# Altium PCB brushless_nosensor - 副本 - 副本.PcbDoc
Units mil, origin at the board's own origin, x right, y up, seen from the top; angles counter-clockwise.
Board outline 1665 x 840 mil, 2 copper layers (Top Layer, Bottom Layer); 70 components, 60 nets, 255 pads, 93 vias.
Unrouted connection lines stored in the file: 1.
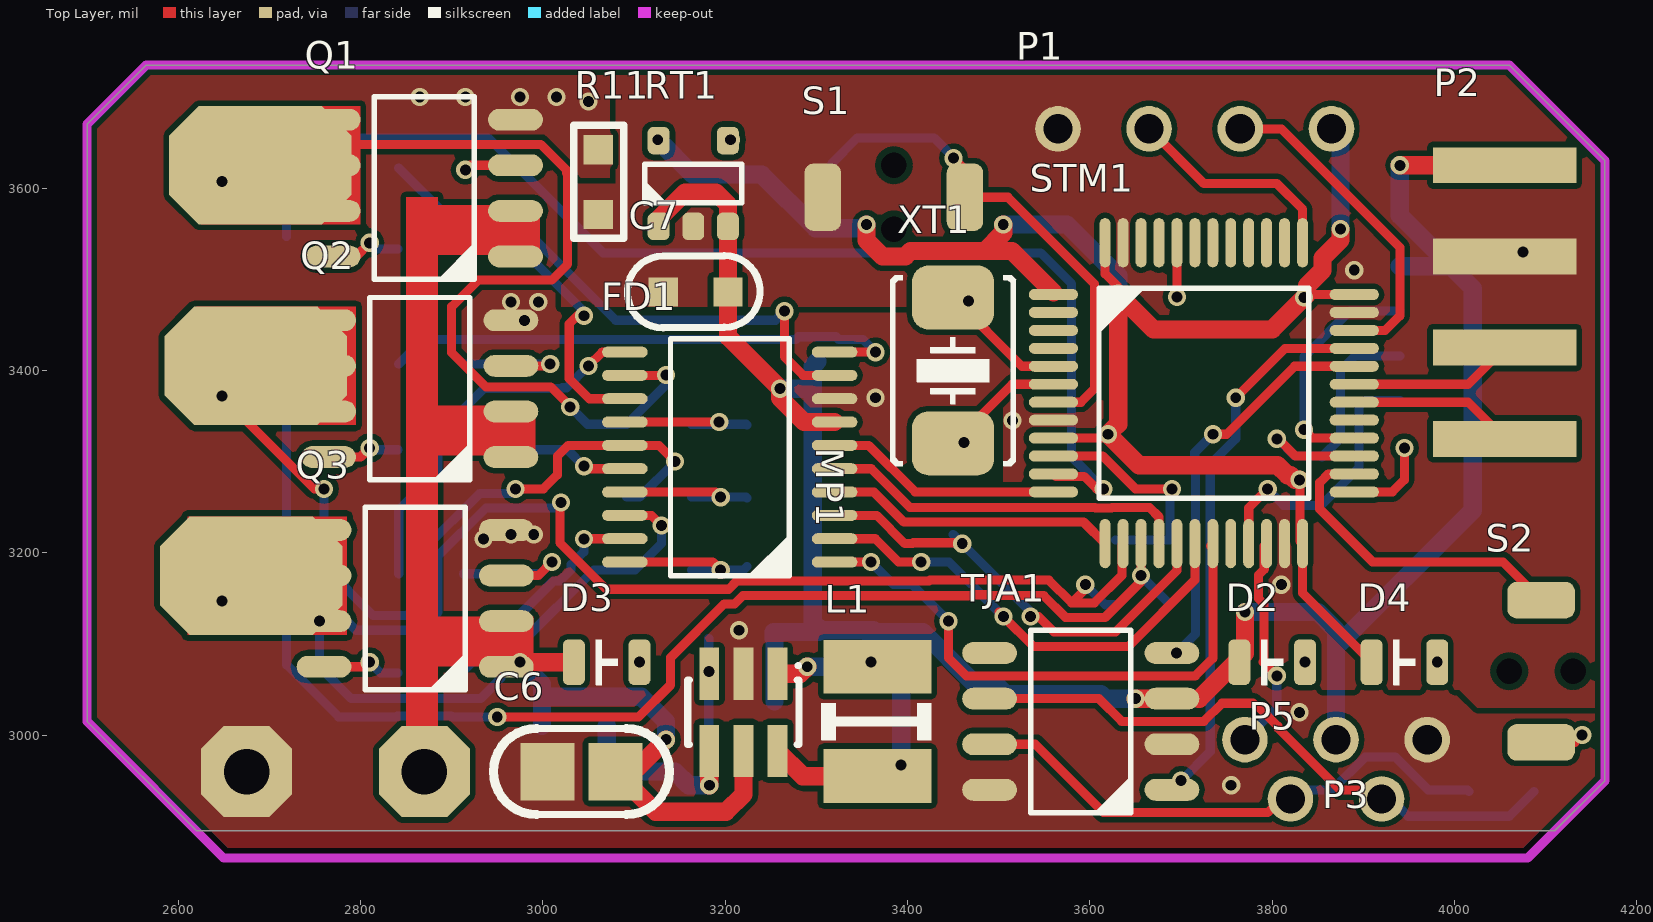
[diagram p0: Top Layer view]
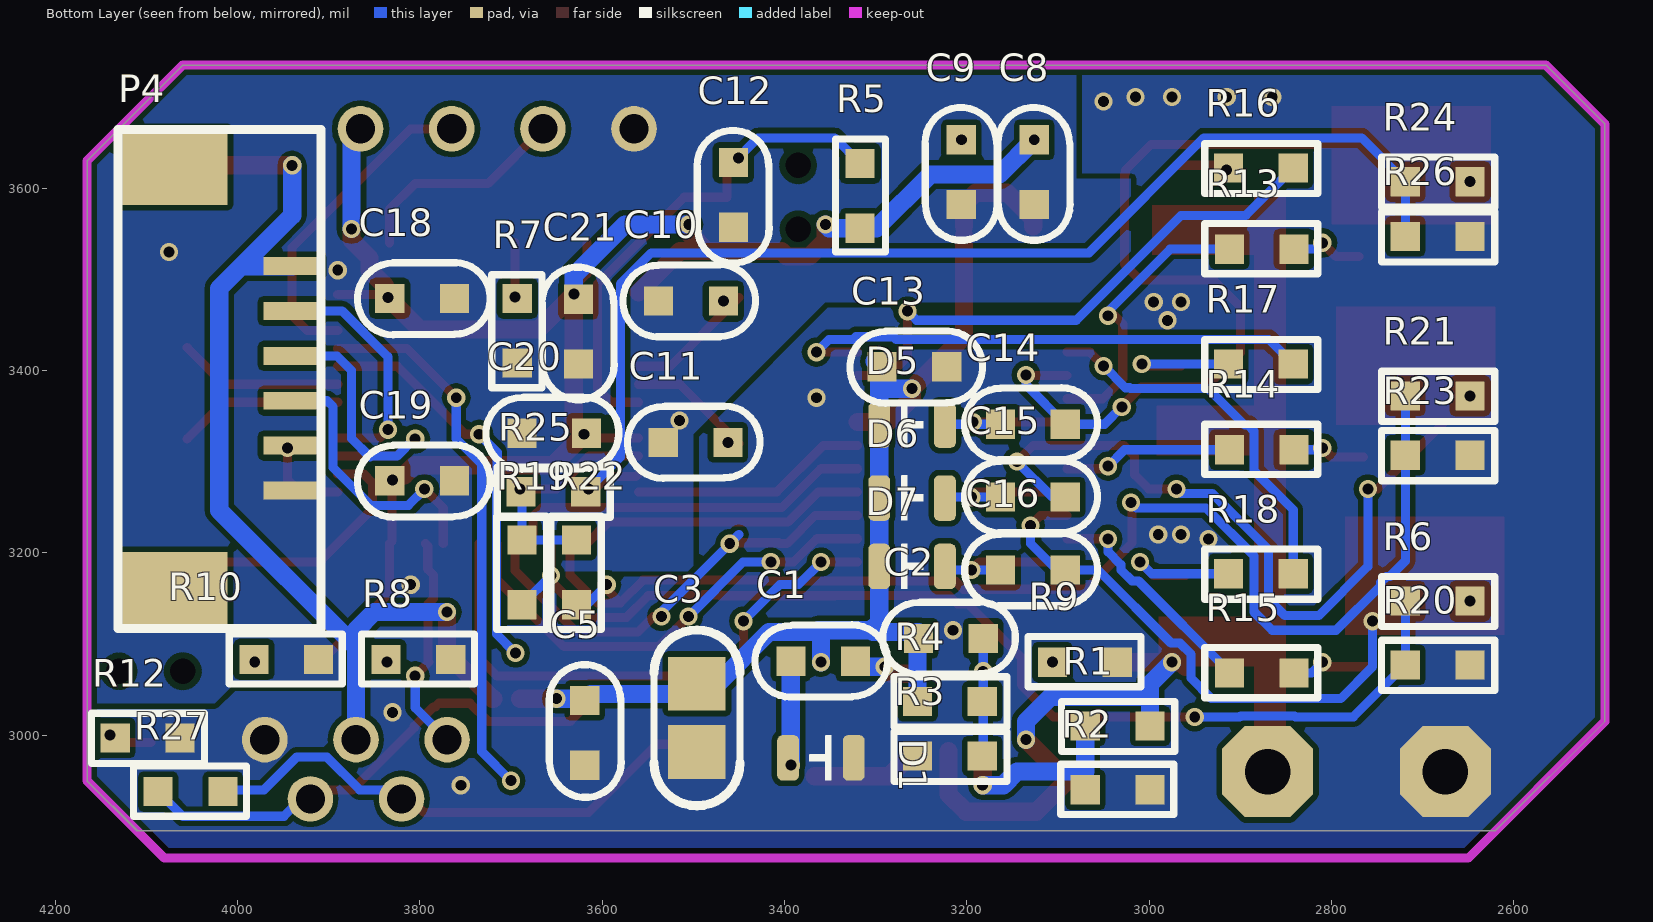
[diagram p1: Bottom Layer view, seen from below]
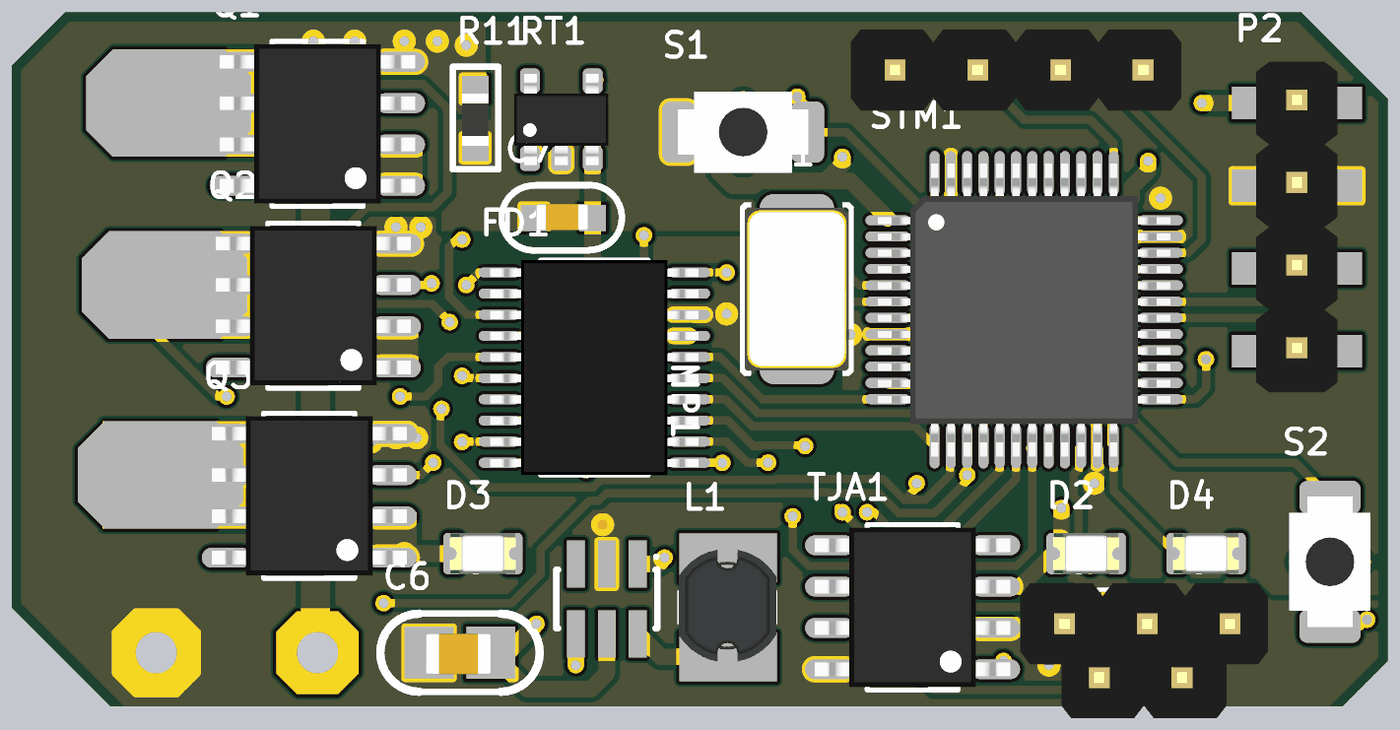
[diagram p2: 3D render of the assembled board from above, using the file's embedded part models]
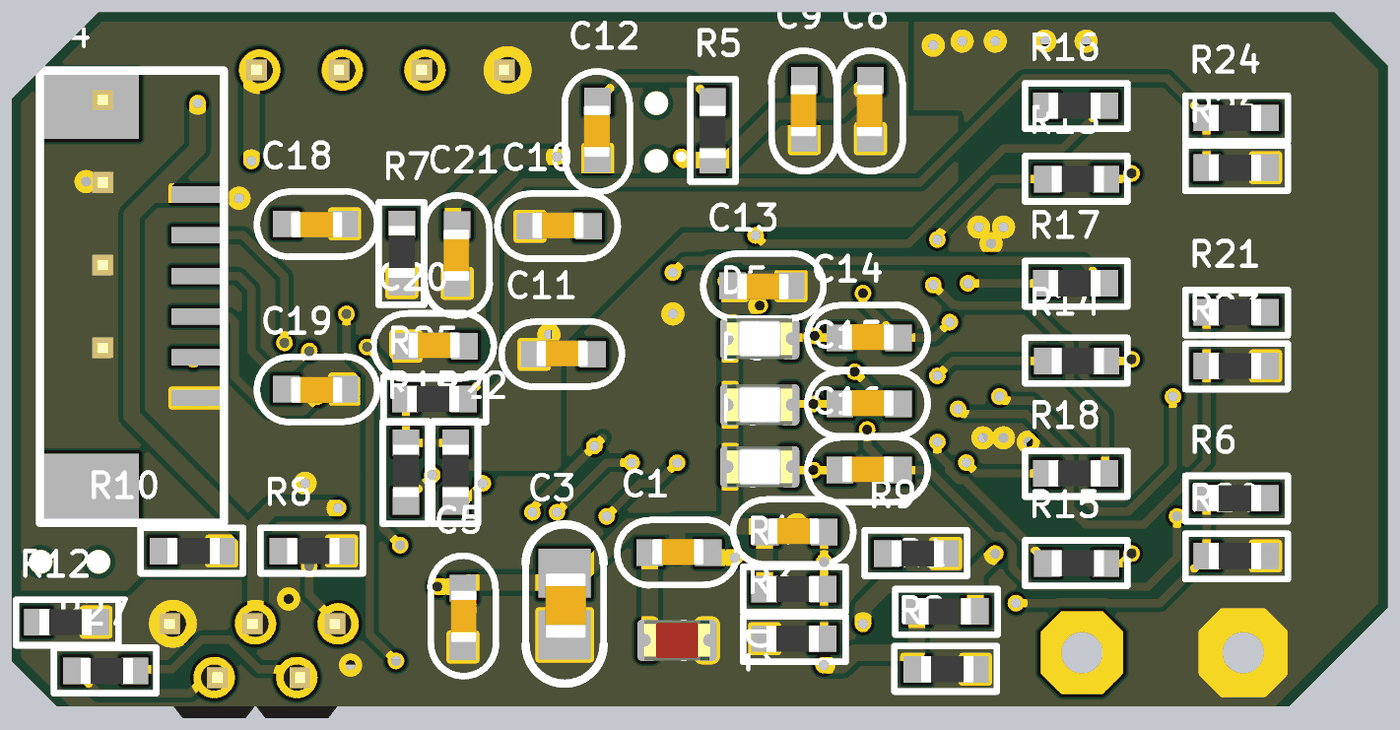
[diagram p3: 3D render of the assembled board from below, using the file's embedded part models]

## Layer stack, top to bottom
Top Solder: solder mask 0.4, Solder Resist, Dk 3.5
Top Layer: signal copper 1.4
Dielectric 1: dielectric 12.6, FR-4, Dk 4.8
Bottom Layer: signal copper 1.4
Bottom Solder: solder mask 0.4, Solder Resist, Dk 3.5

## Board outline
2620,2895 2500,3015 2500,3670 2565,3735 4060,3735 4165,3630 4165,2950 4110,2895

## Design rules (kind name [scope] priority, off if disabled: settings)
Clearance [All] p1: gap=6 ignorepadtopadclearanceinfootprint=FALSE
PlaneConnect [All] p1: planeconnectstyle=Direct reliefexpansion=20 reliefentries=4 reliefconductorwidth=10 reliefairgap=10
PolygonConnect [All] p1: connectstyle=Direct reliefconductorwidth=10 reliefentries=4 polygonreliefangle="90 Angle" airgapwidth=10
RoutingVias [All] p1: holewidth=28 width=50 viastyle="Through Hole" minholewidth=28 minwidth=50 maxholewidth=28 maxwidth=50
SolderMaskExpansion [All] p1: expansion=4
Width [All] p1: maxlimit=100 minlimit=10 preferedwidth=10 minimp=50.000000 maximp=50.000000 favimp=50.000000
29 further rules are at their usual default settings.

## Components (designator, comment, footprint, x,y, rotation, side; value= is the part's Value field where it differs from the comment)
C1 "Cap_0603" CAP_0603 3360,3080 r180 bottom value=0.1u
C2 "Cap_0603" CAP_0603 3220,3105 r180 bottom value=33pF
C3 "Cap_0805" CAP_0805 3495,3020 r90 bottom value=10u
C5 "Cap_0603" CAP_0603 3620,3005 r270 bottom value=0.1uF
C6 "Cap_0805" CAP_0805 3043.46,2959.01 r0 top value=10u
C7 "Cap_0603" CAP_0603 3165,3485 r0 top value=1u
C8 "Cap_0603" CAP_0603 3125,3615 r90 bottom value=0.1u
C9 "Cap_0603" CAP_0603 3205,3615 r90 bottom value=22n
C10 "Cap_0603" CAP_0603 3505,3475 r180 bottom value=20pf
C11 "Cap_0603" CAP_0603 3500,3320 r180 bottom value=20pf
C12 "Cap_0603" CAP_0603 3455,3590 r90 bottom value=0.1u
C13 "Cap_0603" CAP_0603 3255,3405 r0 bottom value=0.1u
C14 "Cap_0603" CAP_0603 3130,3340 r180 bottom value=0.1u
C15 "Cap_0603" CAP_0603 3130,3260 r180 bottom value=0.1u
C16 "Cap_0603" CAP_0603 3130,3180 r180 bottom value=0.1u
C18 "Cap_0603" CAP_0603 3795,3480 r0 bottom value=0.1u
C19 "Cap_0603" CAP_0603 3795,3280 r0 bottom value=0.1u
C20 "Cap_0603" CAP_0603 3655,3330 r180 bottom value=0.1u
C21 "Cap_0603" CAP_0603 3625,3440 r90 bottom value=0.1u
D1 "Diode" LED_0805_RED 3360,2975 r0 bottom
D2 "D_0805" LED_0805_YELLOW 3800,3080 r0 top
D3 "D_0805" LED_0805_YELLOW 3070,3080 r0 top
D4 "D_0805" LED_0805_YELLOW 3945,3080 r0 top
D5 "D_0805" LED_0805_YELLOW 3260,3340 r180 bottom
D6 "D_0805" LED_0805_YELLOW 3260,3260 r180 bottom
D7 "D_0805" LED_0805_YELLOW 3260,3185 r180 bottom
FD1 "FD6288" TSSOP_E170_P0.65_20 3205,3305 r180 top
L1 "Ind_CD32" IND_CD52 3360,3015 r90 top value=10uH
MP1 "MP2451" SOT23-6 3220,3025 r180 top
P1 "HDR1x4_2.54" HDR1x4_2.54_180#1 3865,3665 r270 top
P2 "HDR1x4_2.54" HDR1x4_2.54_180#2 4055,3625 r0 top
P3 "HDR1x3_2.54" HDR1X3_2.54_180 3770,2995 r90 top
P4 "HDR1x6_2.54" 1.25mm_1X6_SMT 3935,3365.16 r90 bottom
P5 "HDR1x2_2.54" HDR1X2_2.54_180 3820,2930 r90 top
Q1 "AO4932" SOP_E150_8 2870,3600 r180 top
Q2 "AO4932" SOP_E150_8 2865,3380 r180 top
Q3 "AO4932" SOP_E150_8 2860,3150 r180 top
R1 "Res_0603" RES_0603 3036,2928 r0 bottom value=20K
R2 "Res_0603" RES_0603 3033,3022 r180 bottom value=10K
R3 "Res_0603" RES_0603 3220,2895 r0 bottom value=23.7k
R4 "Res_0603" RES_0603 3220,2955 r0 bottom value=124K
R5 "Res_0603" RES_0603 3235,3590 r270 bottom value=10K
R6 "Res_0603" RES_0603 2685,3065 r0 bottom value=10K
R7 "Res_0603" RES_0603 3775,3445 r90 bottom value=10K
R8 "Res_0603" RES_0603 3800,3165 r180 bottom value=10K
R9 "Res_0603" RES_0603 3069,3162 r180 bottom value=10K
R10 "Res_0603" RES_0603 3945,3165 r180 bottom value=10K
R11 "Res_0603" RES_0603 3142.82,3605 r270 top value=0R
R12 "Res_0603" RES_0603 4100,2915 r0 bottom value=1K
R13 "Res_0603" RES_0603 2875,3615 r180 bottom value=10R
R14 "Res_0603" RES_0603 2875,3395 r180 bottom value=10R
R15 "Res_0603" RES_0603 2875,3150 r180 bottom value=10R
R16 "Res_0603" RES_0603 2879,3540 r0 bottom value=10R
R17 "Res_0603" RES_0603 2879,3325 r0 bottom value=10R
R18 "Res_0603" RES_0603 2879,3095 r0 bottom value=10R
R19 "Res_0603" RES_0603 3770,3180 r90 bottom value=10K
R20 "Res_0603" RES_0603 2685,2995 r0 bottom value=10K
R21 "Res_0603" RES_0603 2685,3290 r0 bottom value=10K
R22 "Res_0603" RES_0603 3710,3180 r90 bottom value=10K
R23 "Res_0603" RES_0603 2685,3225 r0 bottom value=10K
R24 "Res_0603" RES_0603 2685,3525 r0 bottom value=10K
R25 "Res_0603" RES_0603 3655,3185 r0 bottom value=10K
R26 "Res_0603" RES_0603 2685,3465 r0 bottom value=10K
R27 "Res_0603" RES_0603 4050,3020 r180 bottom value=120R
RT1 "RT9193" SOT23-5 3165,3605 r90 top
S1 "ButtonTACT_3x4x2_180" ButtonTACT_3x4x2_180H 3385,3590 r180 top
S2 "ButtonTACT_3x4x2_180" ButtonTACT_3x4x2_180H 4095,3070 r270 top
STM1 "STM32F072C" LQFP_P0.5_48 3725,3375 r0 top
TJA1 "TJA1050" SOP_E150_8 3590,3015 r180 top
XT1 "XTAL_5032_2P" XT_5032_2 3450,3400 r90 top value=8M

## Footprints (in the part's own frame and the unit in brackets; to place one, negate y for a bottom-side part, rotate by r counter-clockwise, add the part's x,y. Pads: shape width x height; smd on the part's side, far side on the other; paste and mask are expansions set on the pad)
1.25mm_1X6_SMT [mm]
  rect 2.1x3 smd: 0(-5.225,3.425) 0(6.55,3.425)
  rect 0.5x1.6 smd: 1(-2.46,0.127) 2(-1.21,0.127) 3(0.04,0.127) 4(1.29,0.127) 5(2.54,0.127) 6(3.79,0.127)
  silkscreen extent -6.3,-0.67 7.6,4.97
ButtonTACT_3x4x2_180H [mil]
  round 0 hole 28: 0(0,35) 0(0,-35)
  rrect50% 40x74 smd: 1(-78,0) 2(78,0)
  body extent -79,-49 79,49, height 63
CAP_0603 [mil]
  rect 32x32 smd: 1(-33,1) 2(38,1)
  silkscreen extent -72,-38 73,41, body extent -30,-14 33,18, height 31
CAP_0805 [mm]
  rect 1.5x1.6 smd: 1(-0.977,0.025) 2(0.923,0.025)
  silkscreen extent -2.48,-1.17 2.42,1.23, body extent -1.08,-0.64 0.92,0.61, height 1
HDR1X2_2.54_180 [mil]
  round 50 hole 32: 1(0,0) 2(0,-100)
  body extent -49,-150 49,50, height 323
HDR1X3_2.54_180 [mil]
  round 50 hole 32: 1(0,0) 2(0,-100) 3(0,-200)
  body extent -49,-250 49,50, height 323
HDR1x4_2.54_180#1 [mil]
  round 50 hole 32: 1(0,0) 2(0,-100) 3(0,-200) 4(0,-300)
  body extent -49,-350 49,50, height 323
HDR1x4_2.54_180#2 [mil]
  rect 157.48x39.37 smd: 1(0,0) 2(0,-100) 3(0,-200) 4(0,-300)
  body extent -49,-350 49,50, height 323
IND_CD52 [mil]
  rect 59.06x118.11 smd: 1(-60,-7) 2(60,-7)
  silkscreen extent -20,-66 20,54, body extent -66,-65 70,53, height 83
LED_0805_RED [mil]
  rrect50% 24x50 smd: 1(-36,0) 2(36,0)
  silkscreen extent -12,-24 12,24, body extent -40,-25 40,25, height 43
LED_0805_YELLOW [mil]
  rrect50% 24x50 smd: 1(-36,0) 2(36,0)
  silkscreen extent -12,-24 12,24, body extent -40,-25 40,25, height 43
LQFP_P0.5_48 [mil]
  oval 54x12 smd: 1(-165,108.27) 2(-165,88.58) 3(-165,68.9) 4(-165,49.21) 5(-165,29.53) 6(-165,9.84) 7(-165,-9.84) 8(-165,-29.53) 9(-165,-49.21) 10(-165,-68.9) 11(-165,-88.58) 12(-165,-108.27) 25(165,-108.27) 26(165,-88.58) 27(165,-68.9) 28(165,-49.21) 29(165,-29.53) 30(165,-9.84) 31(165,9.84) 32(165,29.53) 33(165,49.21) 34(165,68.9) 35(165,88.58) 36(165,108.27)
  oval 12x54 smd: 13(-108.27,-165) 14(-88.58,-165) 15(-68.9,-165) 16(-49.21,-165) 17(-29.53,-165) 18(-9.84,-165) 19(9.84,-165) 20(29.53,-165) 21(49.21,-165) 22(68.9,-165) 23(88.58,-165) 24(108.27,-165) 37(108.27,165) 38(88.58,165) 39(68.9,165) 40(49.21,165) 41(29.53,165) 42(9.84,165) 43(-9.84,165) 44(-29.53,165) 45(-49.21,165) 46(-68.9,165) 47(-88.58,165) 48(-108.27,165)
  silkscreen extent -115,-115 115,115, body extent -177,-178 177,177, height 61
RES_0603 [mil]
  rect 32x32 smd: 1(-37,-82) 2(34,-82)
  silkscreen extent -64,-109 60,-54, body extent -31,-98 31,-66, height 18
SOP_E150_8 [mil]
  oval 60x24 smd: 1(-100,75) 2(-100,25) 3(-100,-25) 4(-100,-75) 5(100,-75) 6(100,-25) 7(100,25) 8(100,75)
  silkscreen extent -55,-100 55,100, body extent -118,-96 118,96, height 69
SOT23-5 [mil]
  rrect50% 30x24 smd: 1(-47,38) 2(-47,0) 3(-47,-38) 4(47,-38) 5(47,38)
  silkscreen extent -21,-53 21,53, body extent -55,-57 55,57, height 57
SOT23-6 [mm] "SOT-457/SC-74; 6 Leads; Body 3 x 3 mm, inc. leads (LxW max)"
  rect 0.55x1.45 smd: 1(-0.95,-1.075) 2(0,-1.075) 3(0.95,-1.075) 4(0.95,1.075) 5(0,1.075) 6(-0.95,1.075)
  silkscreen extent -1.58,-1.35 1.55,0.9
TSSOP_E170_P0.65_20 [mil]
  oval 50x12 smd: 1(-115,115.16) 2(-115,89.57) 3(-115,63.98) 4(-115,38.39) 5(-115,12.8) 6(-115,-12.8) 7(-115,-38.39) 8(-115,-63.98) 9(-115,-89.57) 10(-115,-115.16) 11(115,-115.16) 12(115,-89.57) 13(115,-63.98) 14(115,-38.39) 15(115,-12.8) 16(115,12.8) 17(115,38.39) 18(115,63.98) 19(115,89.57) 20(115,115.16)
  silkscreen extent -65,-130 65,130, body extent -126,-130 126,130, height 42
XT_5032_2 [mil]
  rrect50% 70x90 smd: 1(-80,0) 2(80,0)
  silkscreen extent -104,-68 104,68, body extent -98,-63 98,63, height 39

## Part data
C1 C2 C3 C5 C6 C7 C8 C9 C10 C11 C12 C13 C14 C15 C16 C18 C19 C20 C21: "Capacitor"
L1: "Inductor"
P1 P2 P3 P5: "Header"
P4: library part HDR1x6_2.54T, "Header"
R1 R2 R3 R4 R5 R6 R7 R8 R9 R10 R11 R12 R13 R14 R15 R16 R17 R18 R19 R20 R21 R22 R23 R24 R25 R26 R27: "Resistor"
RT1: "Power"
S1 S2: "Button"
STM1: library part STM32F103C, "MCU"
XT1: "Crystal Oscillator"

## Free pads (board coordinates)
  oct 200x130 smd: 1(2680,3175) 2(2685,3405)
  oct 100x100 hole 50: 1(2870,2960) 5(2675,2960)
  oct 200x130 smd paste+0: 3(2690,3625)

## Via types
v1: diameter 20, hole 12, Top Layer to Bottom Layer, 93 vias

## Nets (pads, with @x,y where several pads share a name; then routed paths per layer and width w, separated by ;. In a path a pad name is that pad's centre, name@x,y a point inside that pad or via, vN(x,y) a via of type N, cw(c..) or ccw(c..) an arc to the next point about the centre after c; other vN are vias at no path point)
3V3: C8.2 C18.2 C19.2 C20.2 C21.2 D4.1 P1.1 R5.2 RT1.5 STM1.1 STM1.9 STM1.24 STM1.36 STM1.48 | length 1966.1
  Top Layer w10: STM1.9 3615.79,3325.79 v1(3620,3330) ; STM1.48 3616.73,3505.9 3631,3491.63 v1(3631,3484) ; v1(3830,3280) 3830.58,3279.42 3830.58,3212.68 STM1.24 3833.27,3155.73 D4.1 ; v1@3838.27,3483.27 STM1.36
  Top Layer w20: v1(3355,3560) 3355,3542.57 3372.57,3525 3397.43,3525 3403.43,3531 3485,3531 ; v1(3505,3560) 3505,3551 3485,3531 ; STM1.1@3560,3485.58 3514.58,3531 3485,3531 ; v1(3830,3280) 3825.23,3280 3820.13,3285.1 3816.67,3285.1 3805.77,3296 3654,3296 v1(3620,3330) 3631,3341 v1(3631,3484) 3670,3445 3800,3445 v1(3835,3480) 3838.27,3483.27 3838.27,3492.89 3855.27,3509.89 3855.27,3523.34 3875,3543.07 v1(3875,3555)
  Bottom Layer w20: v1(3126,3653) 3164,3615 3240,3615 3299,3556 R5.2 3351,3556 v1(3355,3560) ; v1(3505,3560) 3575,3560 3631,3504 v1(3631,3484) ; P1.1 3875,3655 v1(3875,3555)
5V: C2.1 C3.2 C5.1 C7.2 C13.2 D2.1 D5.1 D6.1 D7.1 FD1.7 L1.2 P2.1 P3.2 P4.6 R4.2 RT1.1 RT1.3 TJA1.3 | length 2498.4
  Top Layer w20: RT1.1 3127,3566.11 3155.89,3595 3190,3595 3203,3582 RT1.3 ; RT1.3@3203,3548 C7.2 3203,3437 v1(3260,3380) 3260,3370 3286.61,3343.39 FD1.7 ; v1(3650,3040) TJA1.3 ; TJA1.3@3719,3040 3720.23,3040 3770,3089.77 v1(3770,3135) ; v1(3940,3625) P2.1
  Bottom Layer w20: R4.2 3254,3105 C2.1 3253,3113 3303,3113 3305,3115 ; v1(3260,3380) 3296,3380 ; C13.2@3301,3410 3296,3405 3296,3380 ; v1(3360,3080) 3360,3112.5 3360.5,3113 ; v1(3650,3040) 3617,3040 3612,3045 3507.33,3045 C3.2 3473.66,3056.34 3417,3113 3360.5,3113 ; v1(3770,3135) 3850,3135 3870,3115 3870,3055 ; P3.2 3870,3055 ; P4.6 3995.63,3514.37 ; v1(3940,3625) 3940,3570 3995.63,3514.37 ; 3296,3380 D5.1 D6.1 D7.1 3296,3124 3305,3115 ; 3305,3115 3362.5,3115 3360.5,3113 ; 3870,3055 3870,3096.63 4020,3246.63 4020,3490 3995.63,3514.37
A: C16.2 FD1.18 pad.1@2680,3175 Q3.5 Q3.6 Q3.7 R6.1 | length 589.9
  Top Layer w10: FD1.18 3118.98,3241.02 v1(3130,3230)
  Bottom Layer w10: v1(2755,3125) 2755,3075 2790,3040 2931.56,3040 2954,3062.44 2954,3088.7 2966.3,3101 2976,3101 3056,3181 C16.2 3101,3181 3130,3210 v1(3130,3230)
  other v1: 2648,3147
AH: FD1.19 R15.1 | length 251.4
  Top Layer w10: v1(3045,3215) 3045.43,3215.43 FD1.19
  Bottom Layer w10: R15.1 2912,3069.33 3011.67,3169 3018.7,3169 3031,3181.3 3031,3187 3045,3201 v1(3045,3215)
AL: FD1.11 R18.1 | length 415.2
  Top Layer w10: v1(3050,3405) 3065.16,3420.16 FD1.11
  Bottom Layer w10: R18.1 2842,3247 2885,3290 2885,3333.56 2891.44,3340 2895,3340 2935,3380 3020.3,3380 3021.3,3381 3026,3381 v1(3050,3405)
B: C15.2 FD1.15 pad.2 Q2.5 Q2.6 Q2.7 R21.1 | length 883
  Top Layer w10: pad.2@2635,3405 2635,3384.47 2749.47,3270 v1(2760,3270) ; v1(2970,3270) 3000.56,3270 3016,3285.44 3016,3306 3027.8,3317.8 FD1.15 3127.2,3317.8 v1(3145,3300)
  Bottom Layer w10: v1(2760,3270) 2760,3185 2814,3131 2851,3131 2869,3149 2869,3203.18 2930.82,3265 2965,3265 v1(2970,3270) ; C15.2 3106,3261 v1(3145,3300)
  other v1: 2648,3372
BH: FD1.16 R14.1 | length 186.6
  Top Layer w10: v1(3045,3295) 3047.8,3292.2 FD1.16
  Bottom Layer w10: R14.1 3027,3313 v1(3045,3295)
BL: FD1.10 R17.1 | length 587.5
  Top Layer w10: FD1.10 3364.84,3420.16 v1(3365,3420)
  Bottom Layer w10: R17.1 2869,3434 3277.44,3434 3280.44,3437 3321.56,3437 3324.56,3434 3351,3434 v1(3365,3420)
C: C14.2 FD1.12 pad.3 Q1.5 Q1.6 Q1.7 R24.1 | length 907.1
  Top Layer w10: pad.3@2773,3648 2997.53,3648 3026,3619.53 3026,3616.44 3027.22,3615.23 3027.22,3516.66 3009.56,3499 2929,3499 2900,3470 2900,3419.47 2937.47,3382 3008.56,3382 3030,3360.56 v1(3030,3360) ; FD1.12 3134.57,3394.57 v1(3135,3395)
  Bottom Layer w10: v1(3030,3360) 3049,3341 C14.2 3135,3384 v1(3135,3395)
  other v1: 2648,3607
CAN_H: P5.1 R27.2 TJA1.7 | length 588.1
  Top Layer w10: TJA1.7@3500,2990 3540,2990 3615,2915 3795,2915 P5.1@3820,2940
  Bottom Layer w10: P5.1@3820,2940 3865.91,2940 3901.91,2976 3934.91,2976 3970.91,2940 4014,2940 R27.2
CAN_L: P5.2 R27.1 TJA1.6 | length 669.3
  Top Layer w10: TJA1.6@3500,3040 3610,3040 3635,3015 3725,3015 3745,3035 3779.09,3035 3783.09,3031 3784.91,3031 3806,3009.91 3806,3008.09 3874.09,2940 P5.2@3920,2940
  Bottom Layer w10: P5.2@3920,2940 3949,2911 4060,2911 R27.1
CAN_RX: STM1.32 TJA1.4 | length 443.3
  Top Layer w10: v1(3735,3330) 3750,3330 3824.53,3404.53 STM1.32
  Bottom Layer w10: v1(3695,3090) 3716,3111 3716,3287.56 3715,3288.56 3715,3310 v1(3735,3330)
CAN_TX: STM1.33 TJA1.1 | length 597.3
  Top Layer w10: v1(3760,3370) 3814.21,3424.21 STM1.33
  Bottom Layer w10: v1(3700,2950) 3732,2982 3732,3297 3760,3325 v1(3760,3370)
CH: FD1.13 R13.1 | length 316
  Top Layer w10: v1(3045,3460) 3038,3460 3029,3451 3029,3391 3051.02,3368.98 FD1.13
  Bottom Layer w10: R13.1 2977,3533 3045,3465 v1(3045,3460)
CH1_L: FD1.4 STM1.13 | length 320.2
  Top Layer w10: FD1.4 3363.13,3266.61 3396.01,3233.73 3593,3233.73 STM1.13
CH2: FD1.3 STM1.17 | length 503.9
  Top Layer w10: FD1.3 3366.09,3241.02 3397.12,3210 3405.3,3210 3406.3,3211 3459,3211 v1(3460,3210) ; v1(3535,3130) 3543.75,3130 3560.75,3113 3628,3113 3695.47,3180.47 STM1.17
  Bottom Layer w10: 3450,3220 v1(3460,3210) 3535,3135 v1(3535,3130)
CH2_L: FD1.5 STM1.16 | length 407.6
  Top Layer w10: FD1.5 3360.17,3292.2 3402.64,3249.73 3605.57,3249.73 3606.3,3249 3623.7,3249 3624.43,3249.73 3665.27,3249.73 3675.79,3239.21 STM1.16
CH3: FD1.2 STM1.18 | length 521.4
  Top Layer w10: FD1.2 3364.57,3215.43 3390,3190 v1(3415,3190) ; v1@3500.3,3135 v1(3505.3,3130) 3538.3,3097 3642,3097 3715.16,3170.16 STM1.18
  Bottom Layer w10: v1(3415,3190) 3445.3,3190 v1(3505.3,3130)
CH3_L: FD1.6 STM1.12 | length 261.2
  Top Layer w10: FD1.6 3357.2,3317.8 3408.27,3266.73 STM1.12
CH4: FD1.1 STM1.19 | length 627.8
  Top Layer w10: FD1.1 v1(3359.84,3189.84) ; v1(3445,3125) 3445,3084.47 3464.47,3065 3715.53,3065 3734.84,3084.32 STM1.19 STM1.19@3732.16,3207.32
  Bottom Layer w10: v1(3359.84,3189.84) 3384.68,3165 3405,3165 v1(3445,3125)
CL: FD1.9 R16.1 | length 609.8
  Top Layer w10: v1(3265,3465) 3265,3415 3285.43,3394.57 FD1.9
  Bottom Layer w10: R16.1 2894,3570 2965,3570 3080,3455 3255,3455 v1(3265,3465)
CSN: P4.2 STM1.25 | length 95.5
  Top Layer w10: STM1.25 3931.73,3266.73 3945,3280 v1(3945,3315)
GND: C7.1 C8.1 C9.1 C10.1 C11.1 C12.1 C18.1 C19.1 C20.1 C21.1 P1.4 P2.2 P4.1 R7.1 R8.2 R10.2 R11.2 RT1.2 S1.2 STM1.8 STM1.23 STM1.35 STM1.47
  other v1: 3810,3165 3515,3345 3890,3510 4075,3530
INA: R6.2 R19.1 R20.2 STM1.15 | length 1218.2
  Top Layer w10: v1(2950,3020) 3105,3020 3140,3055 3140,3085 3199,3144 3210.33,3144 3219.33,3153 3344.36,3153 3344.52,3152.84 3470.14,3152.84 3471.3,3154 3488.7,3154 3489.7,3153 3549.37,3153 3573.37,3129 3616.63,3129 3656.1,3168.48 v1(3656.1,3175) STM1.15
  Bottom Layer w10: R6.2 R20.2 2776,3020 2839.44,3020 2840.44,3021 2899.56,3021 2900.56,3020 v1(2950,3020) ; v1(3656.1,3175) 3688,3143.1 R19.1
INB: R21.2 R22.1 R23.2 STM1.14 | length 1425.7
  Top Layer w10: v1@3018.7,3258.7 3018.7,3211 3069.7,3160 3203.7,3160 3212.7,3169 3350.99,3169 3351.14,3168.84 3423.54,3168.84 3424.7,3170 3555,3170 3580,3145 ; v1(3595,3165) 3595,3160 3580,3145 ; STM1.14 3635.1,3208.68 3635.1,3175.1 3605,3145 3580,3145
  Bottom Layer w10: R21.2 R23.2 2719,3191 2736,3174 2739.56,3174 2746,3167.56 2746,3164 2795,3115 2865,3115 2885,3135 2885,3196.56 2937.44,3249 3014,3249 v1(3020,3255) ; v1(3595,3165) 3617,3143 R22.1
INC: R24.2 R25.1 R26.2 STM1.11 | length 1312.7
  Top Layer w10: STM1.11 3562.68,3283.73 3593.64,3283.73 3607.37,3270 v1(3615,3270)
  Bottom Layer w10: R26.2 R24.2 2767,3655 2940,3655 3066,3529 3546,3529 3580,3495 3580,3305 R25.1
INP: R19.2 R22.2 R25.2 STM1.10 | length 258.4
  Top Layer w10: STM1.10 3613.9,3306.1 3650,3270 v1(3690,3270)
  Bottom Layer w10: R22.2 R19.2 3688,3266 R25.2
KEY: S2.1 STM1.26 | length 355.3
  Top Layer w10: STM1.26 3861.42,3286.42 3852,3277 3852,3248 3910,3190 4053,3190 S2.1
MISO: P4.5 STM1.28 | length 264.6
  Top Layer w10: v1(3835,3335) 3844.21,3325.79 STM1.28
  Bottom Layer w10: v1(3835,3335) 3835,3415 3885.16,3465.16 P4.5
MOSI: P4.4 STM1.27 | length 325.7
  Top Layer w10: v1(3805,3325) 3806.47,3325 3825.37,3306.1 STM1.27
  Bottom Layer w10: v1(3805,3325) 3806,3325 3825,3306 3853.56,3306 3854.56,3305 3875,3325.44 3875,3400 3890.95,3415.95 P4.4
NetC1_1: C1.1 D1.2 L1.1 MP1.6 | length 235.1
  Top Layer w20: MP1.6 3285.08,2955 L1.1
  Bottom Layer w20: v1(3393,2967) C1.1
NetC1_2: C1.2 MP1.1 | length 70.3
  Top Layer w20: MP1.1 3282.32,3067.32 v1(3290,3075)
  Bottom Layer w20: v1(3290,3075) 3316,3075 C1.2
NetC2_2: C2.2 MP1.3 R3.1 R4.1 | length 129.4
  Bottom Layer w10: C2.2 3182,2978 R3.1
  other v1: 3182,3070
NetC9_2: C9.2 RT1.4
  other v1: 3206,3653
NetC10_2: C10.2 STM1.5 XT1.2 | length 141.3
  Top Layer w10: XT1.2 3525.47,3404.53 STM1.5
  other v1: 3467,3476
NetC11_2: C11.2 STM1.6 XT1.1 | length 136.9
  Top Layer w10: XT1.1 3514.84,3384.84 STM1.6
  other v1: 3462,3321
NetC14_1: C14.1 D5.2 FD1.14 | length 164.8
  Top Layer w10: FD1.14 v1(3193.39,3343.39)
  Bottom Layer w10: C14.1 3223,3341 D5.2
NetC15_1: C15.1 D6.2 FD1.17 | length 168.7
  Top Layer w10: FD1.17 3189.39,3266.61 v1(3195,3261)
  Bottom Layer w10: C15.1 v1(3195,3261) 3223,3261 D6.2
NetC16_1: C16.1 D7.2 FD1.20 | length 171.3
  Top Layer w10: FD1.20 3186.16,3189.84 v1(3195,3181)
  Bottom Layer w10: C16.1 v1(3195,3181) 3220,3181 D7.2
NetD2_2: D2.2 R8.1
  other v1: 3836,3080
NetD3_2: D3.2 R9.1
  other v1: 3106,3080
NetD4_2: D4.2 R10.1
  other v1: 3981,3080
NetMP1_4: MP1.4 R1.2 R2.1 | length 206.5
  Top Layer w20: v1(3182.6,2945) MP1.4
  Bottom Layer w20: R1.2 3070,2960 3145,2960 3160,2945 v1(3182.6,2945)
NetQ1_3: Q1.3 R16.2 | length 57.1
  Top Layer w10: v1(2915,3620) 2920,3625 Q1.3
NetQ1_8: Q1.8 R13.2 | length 80.1
  Top Layer w10: Q1.8 2795,3525 v1(2810,3540)
  Bottom Layer w10: v1(2810,3540) 2817,3533 R13.2
NetQ2_3: Q2.3 R17.2 | length 138.8
  Top Layer w10: Q2.3 3006,3405 v1(3008,3407)
  Bottom Layer w10: R17.2 v1(3008,3407)
NetQ2_8: Q2.8 R14.2 | length 81
  Top Layer w10: Q2.8 2800,3305 v1(2810,3315)
  Bottom Layer w10: v1(2810,3315) 2812,3313 R14.2
NetQ3_3: Q3.3 R18.2 | length 158.6
  Top Layer w10: Q3.3 2995,3175 v1(3010,3190)
  Bottom Layer w10: R18.2 2997,3177 v1(3010,3190)
NetQ3_8: Q3.8 R15.2 | length 88
  Top Layer w10: Q3.8 2805,3075 v1(2810,3080)
  Bottom Layer w10: v1(2810,3080) 2822,3068 R15.2
NetR7_2: R7.2 STM1.44 | length 59.5
  Top Layer w10: v1(3695.47,3480.47) STM1.44
NetR12_2: R12.2 S2.2 | length 48.3
  Top Layer w10: S2.2 4132,2992 v1(4140,3000)
PGND: C3.1 C5.2 C6.1 C13.1 D1.1 FD1.8 MP1.2 P3.3 pad.5 Q1.4 Q2.4 Q3.4 R2.2 R3.2 R9.2 R11.1 R12.1 R20.1 R23.1 R26.1 TJA1.2 TJA1.8
  other v1: 3755,2945 3830,3025 3215,3115 2935,3215 2965,3220 2990,3220 3365,3370 2980,3455 2965,3475 2995,3475 3050,3695 2865,3700 2915,3700 2975,3700 3015,3700
PWM_IN: P3.1 STM1.22 | length 242.3
  Top Layer w10: STM1.22 3791.21,3207.32 3791.21,3181.96 3785,3175.75 3785,3149.7 3791,3143.7 3791,3081.08 3789.96,3080.04 v1(3805,3065)
  Bottom Layer w10: P3.1 3805,3030 v1(3805,3065)
RST: C12.2 R5.1 S1.1 STM1.7 | length 557.3
  Top Layer w10: v1(3450.44,3632.8) 3463,3620.24 S1.1 3510,3590 3605,3495 3605,3380 3590.16,3365.16 STM1.7
  Bottom Layer w10: R5.1 3345,3655 3429,3655 C12.2
RXD: P2.3 STM1.31 | length 181.6
  Top Layer w10: STM1.31 4014.84,3384.84 P2.3
SCK: P4.3 STM1.21 | length 307.9
  Top Layer w10: STM1.21 3774.21,3249.21 v1(3795,3270)
  Bottom Layer w10: v1(3795,3270) 3795,3269.44 3812.44,3252 3853.56,3252 3895,3293.44 3895,3360 3901.73,3366.73 P4.3
SWCLK: P1.3 STM1.37 | length 241.6
  Top Layer w10: P1.3 3725,3605 3805,3605 3833.27,3576.73 STM1.37
SWDIO: P1.2 STM1.34 | length 360.5
  Top Layer w10: P1.2 3810,3665 3940,3535 3940,3460 3923.9,3443.9 STM1.34
TXD: P2.4 STM1.30 | length 181.6
  Top Layer w10: STM1.30 4014.84,3365.16 P2.4
VIN: C6.2 D3.1 MP1.5 pad.1@2870,2960 Q1.1 Q1.2 Q2.1 Q2.2 Q3.1 Q3.2 R1.1 | length 607.7
  Top Layer w20: Q3.1 2965,3080 v1(2975,3080) D3.1 ; v1(3135,2995) 3100,2960 C6.2 3123.8,2916 3201,2916 3220,2935 MP1.5
  Bottom Layer w20: v1(2975,3080) 2999,3056 2999,3040 ; R1.1 2999,3040 ; v1(3135,2995) 3135,3015 3108,3042 3001,3042 2999,3040
pads on no net: P4.0 S1.0 S2.0 STM1.2 STM1.3 STM1.4 STM1.20 STM1.29 STM1.38 STM1.39 STM1.40 STM1.41 STM1.42 STM1.43 STM1.45 STM1.46 TJA1.5

## Polygon pours and split planes (outlines as drawn)
PGND on Top Layer "Top Layer-No Net" (solid, remove dead copper, pour order 8): 2360.48,3846.21 4325.48,3846.21 4400.48,3771.21 4295.48,3666.21 4295.48,2776.21 2435.48,2776.21 2415.48,2756.21
GND on Top Layer "Top Layer-No Net" (solid, remove dead copper, pour order 0): 3020,3605 3080,3605 3080,3795 3100,3815 3120,3795 4245,3795 4245,3030 4025,3030 4005.23,3049.77 3730,3049.77 3730,3155 3710,3175 3505,3175 3505,3470 3020,3470
PGND on Bottom Layer "Top Layer-No Net" (solid, remove dead copper, pour order 10): 2472.81,2802.3 2367.81,2907.3 2367.81,3807.3 4282.81,3807.3 4282.81,2757.3
GND on Bottom Layer "Top Layer-No Net" (solid, remove dead copper, pour order 2): 3020,3610 3080,3610 3080,3800 3100,3820 3120,3800 4245,3800 4245,3035 4025,3035 4005.23,3054.77 3730,3054.77 3730,3160 3710,3180 3500,3180 3500,3330 3355,3475 3020,3475

## Keep-outs
Keep-Out Layer:
  lines w10: 2500,3015 2650,2865 4080,2865 4165,2950 4165,3630 4060,3735 2565,3735 2500,3670 2500,3015

## Other copper
Top Layer:
  rectangle net VIN: 2857,3526.65 2997,3581.65
  rectangle net VIN: 2852,3306.65 2992,3361.65
  rectangle net C: 2625,3560 2800,3690
  rectangle net B: 2620,3340 2795,3470
  rectangle net A: 2610,3110 2785,3240
  rectangle net VIN: 2850,3075 2990,3130
  rectangle net VIN: 2850,2940 2885,3590

## Silkscreen, mask and mechanical layers (free items; w line width, h text height)
Top Solder:
  rectangle: 2625,3560 2800,3690
  rectangle: 2610,3110 2785,3240
  rectangle: 2620,3340 2795,3470